# Altium PCB BLDC_Gimbal.PcbDoc (part 2 of 3)
Units mil, origin at the board's own origin, x right, y up, seen from the top; angles counter-clockwise.
Board outline 4133.86 x 2204.72 mil, 4 copper layers (Top Layer, GND, Power, Bottom Layer), stack 23.756 mil thick; 131 components, 105 nets, 517 pads, 595 vias.
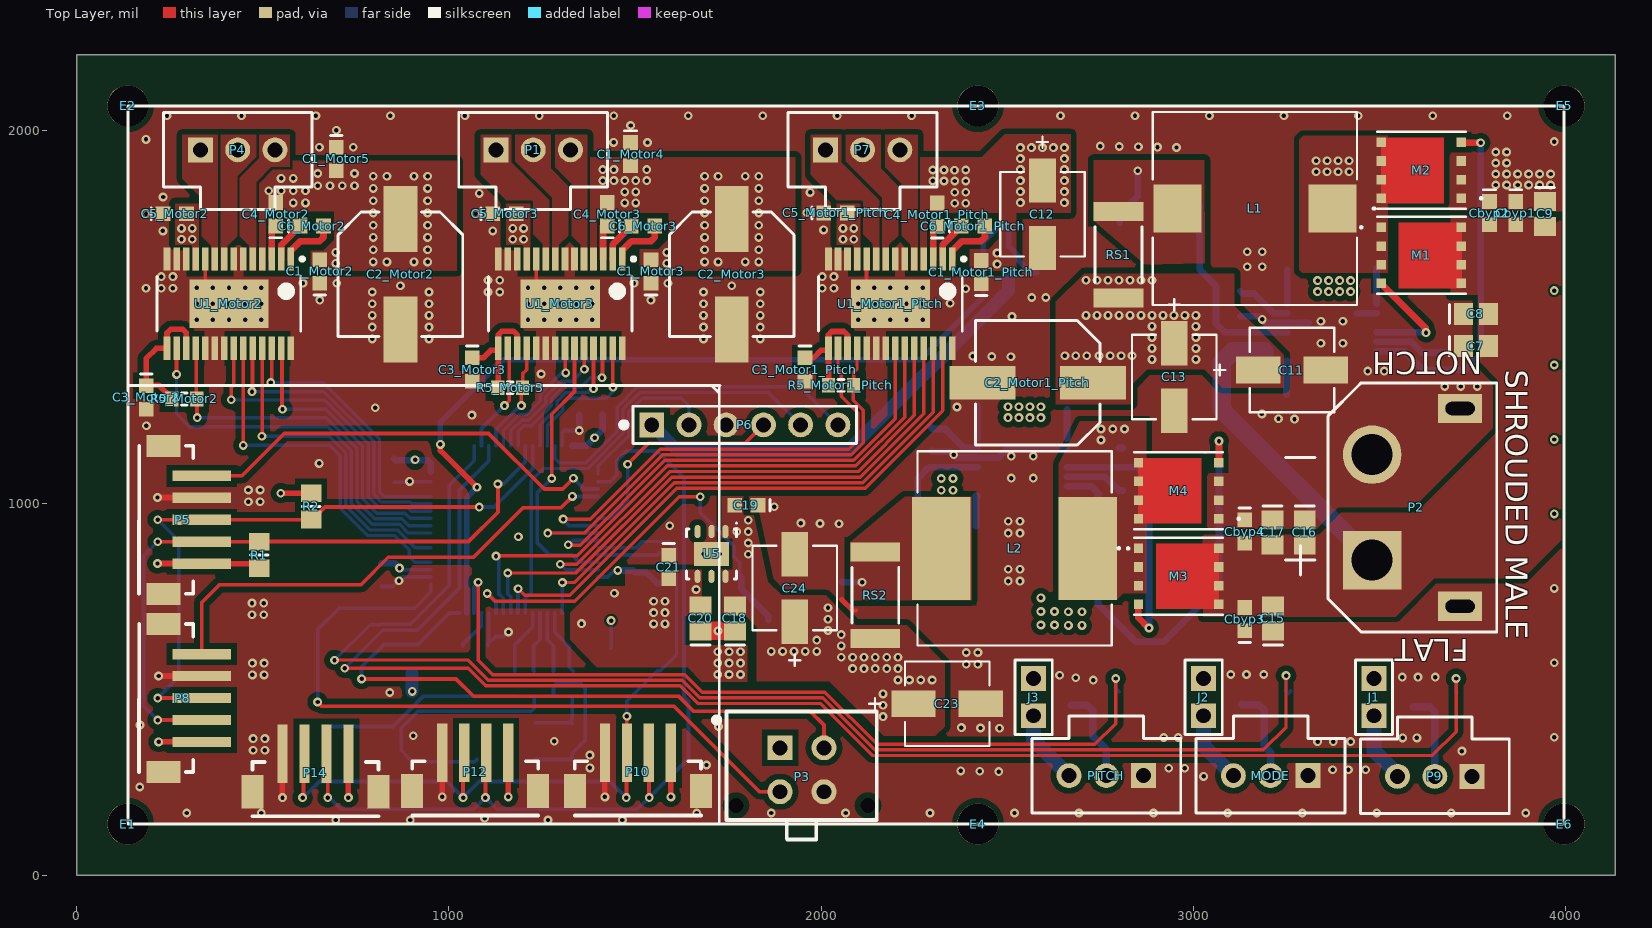
[diagram p0: Top Layer view]

## Part data (continued)
M2 M3 M4: "MOSFET N-CH 60V 50A 8-Pin VSON-FET EP T/R", Continuous Drain Current (ID)=62A, Drain to Source Breakdown Voltage=60V, Drain to Source Resistance=13mR, Gate to Source Voltage (Vgs)=20V, Input Capacitance=1.48nF, Manufacturer="Texas Instruments", Max Operating Temperature=150°C, Max Power Dissipation=3.2W, Min Operating Temperature=-55°C, Package Quantity=2500, Supplier Part Number 1=296-36455-1-ND, ComponentLink1Description=https://datasheet.ciiva.com/24021/slps391a-316771-24021744.pdf?src-supplier=Mouser, ComponentLink1URL=https://datasheet.ciiva.com/24021/slps391a-316771-24021744.pdf?src-supplier=Mouser, ComponentLink2Description=https://datasheet.ciiva.com/23803/1762822-23803793.pdf?src-supplier=Newark, ComponentLink2URL=https://datasheet.ciiva.com/23803/1762822-23803793.pdf?src-supplier=Newark, ComponentLink3Description=https://datasheet.ciiva.com/29755/csd18537nq5a-29755636.pdf?src-supplier=Digi-Key, ComponentLink3URL=https://datasheet.ciiva.com/29755/csd18537nq5a-29755636.pdf?src-supplier=Digi-Key, ComponentLink4Description=https://datasheet.ciiva.com/25645/csd18537nq5a-25645525.pdf?src-supplier=Digi-Key, ComponentLink4URL=https://datasheet.ciiva.com/25645/csd18537nq5a-25645525.pdf?src-supplier=Digi-Key, ComponentLink5Description=https://datasheet.ciiva.com/30021/csd18537nq5a-30021926.pdf?src-supplier=Avnet, ComponentLink5URL=https://datasheet.ciiva.com/30021/csd18537nq5a-30021926.pdf?src-supplier=Avnet, ComponentLink6Description=https://datasheet.ciiva.com/30021/csd18537nq5a-30021927.pdf?src-supplier=Avnet, ComponentLink6URL=https://datasheet.ciiva.com/30021/csd18537nq5a-30021927.pdf?src-supplier=Avnet, ComponentLink7Description=https://datasheet.ciiva.com/18566/csd18537nq5a-18566856.pdf?src-supplier=Digi-Key, ComponentLink7URL=https://datasheet.ciiva.com/18566/csd18537nq5a-18566856.pdf?src-supplier=Digi-Key, Contact Plating=Copper, Drain to Source Voltage (Vdss)=60V, Element Configuration=Single, Fall Time=3.2ns, Lead Free="Contains Lead", Manufacturer Part Number=CSD18537NQ5A, Mount="Surface Mount", Nominal Vgs=3V, Number of Elements=1, Number of Pins=8, Packaging="Tape and Reel", Power Dissipation=3.2W, Pricing 1="1 = 0.94000, 10 = 0.83000, 100 = 0.65610, 500 = 0.50882, 1000 = 0.40170 (USD)", Radiation Hardening=No, Rds On Max=13mR, REACH SVHC="No SVHC", Rise Time=4ns, RoHS=Yes, Stock 1=21532, Supplier 1=Digi-Key, Turn-Off Delay Time=14.4ns, Turn-On Delay Time=5.8ns
MODE P1 P4 P7 P9 PITCH: library part "1x3-Pin, Pitch: 0.1\" (2.54mm), Tin, THT, Shrouded, Locking, 70543-0037", "1x3-Pin, Pitch: 0.1\" (2.54mm), Tin, THT, Shrouded, Locking, 70543-0037", Supplier Part Number 1=WM4825-ND, LatestRevisionDate=2014-03-18, LatestRevisionNote="Changed # of pins from 4 to 3", Mfg="Molex Inc", Mfg#=70543-0037, Published=2014-03-16, Publisher="UVic AERO, Kirk Richardson", ReviewedBy="Matthew Fitz", ReviewedDate=2014-03-19, ReviewedNote="There should be tin pins instead of gold", Supplier 1=Digi-Key, Verified=Yes
P2: "XT60 - 2x1-Pin, Pitch: 3.00mm, Battery Connector", Published=2016-12-15, Publisher="UVic AERO, Luke Mills"
P3: library part "2x2-Pin, Pitch: 3.00mm, Tin, THT, 43045-0412", "2x2-Pin, Pitch: 3.00mm, Tin, THT, Shrouded, Locking, 43045-0412", Supplier Part Number 1=WM1790-ND, LatestRevisionBy="Kirk Richardson", LatestRevisionDate=2014-03-23, LatestRevisionNote="Fixed footprint so it's aligned to pin 1", Mfg=Molex, Mfg#=43045-0412, Published=2014-03-13, Publisher="UVic AERO, Taylor Eby", ReviewedBy="Kirk Richardson", ReviewedDate=2014-03-23, Supplier 1=Digi-Key, Verified=Yes
P5 P8: "CONN HEADER ZH TOP 5POS 1.5MM", Color=Natural, Current Rating=1A, Manufacturer=JST, Supplier Part Number 1=455-1684-1-ND, ComponentLink1Description=http://www.jst-mfg.com/product/pdf/eng/eZH.pdf?src-supplier=Digi-Key, ComponentLink1URL=http://www.jst-mfg.com/product/pdf/eng/eZH.pdf?src-supplier=Digi-Key, ComponentLink2Description=http://www.jst-mfg.com/product/pdf/eng/eZR.pdf?src-supplier=Future+Electronics, ComponentLink2URL=http://www.jst-mfg.com/product/pdf/eng/eZR.pdf?src-supplier=Future+Electronics, Connector Type="Male Pin", Contact Material=Tin, Contact Plating=Tin, Fastening Type=Detent, Gender=Male, Height=7.2mm, Housing Color=Natural, Housing Material=Nylon, Lead Free="Lead Free", Length=10.5mm, Manufacturer Part Number=B5B-ZR-SM4-TF(LF)(SN), Mount="Surface Mount", Number of Contacts=5, Number of Positions=5, Number of Rows=1, Packaging="Tape and Reel", Pitch=0.059inch, Pricing 1="1 = 0.790000, 10 = 0.742000, 100 = 0.568600, 500 = 0.494420 (USD)", RoHS=Yes, Stock 1=52019, Supplier 1=Digi-Key, Termination=Solder, Width=3.5mm
P6: library part "Header, 1x6-Pin, Pitch: 0.1\" (2.54mm), Gold 30µin, THT, 68000-106HLF", "Header, 1x6-Pin, Pitch: 0.1\" (2.54mm), Gold 30µin, THT, 68000-106HLF", Supplier Part Number 1=609-3249-ND, Mfg=FCI, Mfg#=68000-106HLF, Published=2014-03-16, Publisher="UVic AERO, Kirk Richardson", Supplier 1=Digi-Key, Verified=No
P10 P12 P14: "Conn Shrouded Header HDR 4 POS 1.5mm Solder ST SMD T/R", Color=Natural, Contact Resistance=30mR, Current Rating=1A, Housing Color=Beige, Manufacturer=JST, Max Operating Temperature=85°C, Max Voltage Rating (AC)=50V, Min Operating Temperature=-25°C, Supplier Part Number 1=455-1683-1-ND, ComponentLink1Description=https://datasheet.ciiva.com/26924/getdatasheetpartid-640935-26924037.pdf?src-supplier=Verical, ComponentLink1URL=https://datasheet.ciiva.com/26924/getdatasheetpartid-640935-26924037.pdf?src-supplier=Verical, Connector Type="Male Pin", Contact Material=Tin, Contact Plating=Tin, Depth=3.7mm, Fastening Type=Detent, Gender=Male, Height=7.2mm, Housing Material=Polyamide, Lead Free="Lead Free", Length=9mm, Manufacturer Part Number=B4B-ZR-SM4-TF(LF)(SN), Max Current Rating=1A, Mount="Surface Mount", Number of Contacts=4, Number of Positions=4, Number of Rows=1, Orientation=Straight, Packaging="Tape and Reel", Pitch=1.5mm, Pricing 1="1 = 0.71000, 10 = 0.67000, 100 = 0.51380, 500 = 0.44682 (USD)", RoHS=Yes, Stock 1=27718, Supplier 1=Digi-Key, Termination=Solder, Width=3.5mm
R1 R2 R3 R4: library part RC0805FR-074K7L, "RES SMD 4.7k ohm, 150 V, 0805 [2012 Metric], 250 mW,  1%", Case/Package=0805, Case Code (Metric)=2012, Manufacturer=Yageo, Max Operating Temperature=155°C, Max Power Dissipation=125mW, Min Operating Temperature=-55°C, Package Quantity=5000, Resistance=4.7kR, Supplier Part Number 1=311-4.70KCRCT-ND, Temperature Coefficient=100ppm/°C, Tolerance=1%, Voltage Rating=150V, Case Code (Imperial)=0805, ComponentLink1Description=https://datasheet.ciiva.com/11808/0900766b8106beab-11808155.pdf?src-supplier=RSComponents, ComponentLink1URL=https://datasheet.ciiva.com/11808/0900766b8106beab-11808155.pdf?src-supplier=RSComponents, ComponentLink2Description=https://datasheet.ciiva.com/7941/1686128-7941805.pdf?src-supplier=Element14, ComponentLink2URL=https://datasheet.ciiva.com/7941/1686128-7941805.pdf?src-supplier=Element14, ComponentLink3Description=https://datasheet.ciiva.com/7941/444164-7941806.pdf?src-supplier=Element14, ComponentLink3URL=https://datasheet.ciiva.com/7941/444164-7941806.pdf?src-supplier=Element14, ComponentLink4Description=https://datasheet.ciiva.com/6547/pyu-r-int-thick-7-6547263.pdf?src-supplier=Digi-Key, ComponentLink4URL=https://datasheet.ciiva.com/6547/pyu-r-int-thick-7-6547263.pdf?src-supplier=Digi-Key, ComponentLink5Description=https://datasheet.ciiva.com/7941/444164-7941804.pdf?src-supplier=Element14, ComponentLink5URL=https://datasheet.ciiva.com/7941/444164-7941804.pdf?src-supplier=Element14, ComponentLink6Description=https://datasheet.ciiva.com/46447/444164-46447583.pdf?src-supplier=Element14, ComponentLink6URL=https://datasheet.ciiva.com/46447/444164-46447583.pdf?src-supplier=Element14, Composition="Thick Film", Depth=1.25mm, Features="Moisture Resistant", Height=0.024inch, Lead Free="Lead Free", Length=0.079inch, Manufacturer Part Number=RC0805FR-074K7L, Military Standard=Not, Number of Pins=2, Number of Terminations=2, Packaging="Tape and Reel", Power Rating=125mW, Pricing 1="1 = 0.10000, 10 = 0.04200, 100 = 0.01700, 1000 = 0.00762, 2500 = 0.00662 (USD)", REACH SVHC="No SVHC", RoHS=Yes, Stock 1=5392599, Supplier 1=Digi-Key, Termination=SMD/SMT, Voltage Rating (DC)=150V, Width=0.049inch
R5_Motor1_Pitch R5_Motor2 R5_Motor3: library part "10.0K, 1%, 1/10 W, 0603 SMD", "Resistor, 1%, 1/10 W, 0603 SMD, 10.0K, +/-100ppm/C, Thick Film", Power=1/10W, Supplier Part Number 1=311-10.0KHRCT-ND, PackageDescription="Chip Resistor", Published="Jan 14, 2011", Publisher="TRAXX Automation Ltd.", Supplier 1=Digi-Key
R6: "RES SMD 2.74K OHM 1% 1/8W 0805", Case/Package=0805, Case Code (Metric)=2012, Manufacturer=Panasonic, Max Operating Temperature=155°C, Max Power Dissipation=125mW, Min Operating Temperature=-55°C, Package Quantity=5000, Resistance=2.74k, Supplier Part Number 1=P2.74KCCT-ND, Temperature Coefficient=100ppm/°C, Tolerance=1%, Voltage Rating=150V, Case Code (Imperial)=0805, ComponentLink1Description=https://datasheet.ciiva.com/34303/1989210-34303628.pdf?src-supplier=Jameco, ComponentLink1URL=https://datasheet.ciiva.com/34303/1989210-34303628.pdf?src-supplier=Jameco, ComponentLink2Description=https://datasheet.ciiva.com/16773/70260748-16773765.pdf?src-supplier=Allied+Electronics, ComponentLink2URL=https://datasheet.ciiva.com/16773/70260748-16773765.pdf?src-supplier=Allied+Electronics, ComponentLink3Description=https://datasheet.ciiva.com/46389/426256-46389477.pdf?src-supplier=Element14, ComponentLink3URL=https://datasheet.ciiva.com/46389/426256-46389477.pdf?src-supplier=Element14, ComponentLink4Description=https://datasheet.ciiva.com/6129/426256-6129654.pdf?src-supplier=Farnell, ComponentLink4URL=https://datasheet.ciiva.com/6129/426256-6129654.pdf?src-supplier=Farnell, ComponentLink5Description=https://datasheet.ciiva.com/30134/aoa0000ce2-30134518.pdf?src-supplier=Onlinecomponents.com, ComponentLink5URL=https://datasheet.ciiva.com/30134/aoa0000ce2-30134518.pdf?src-supplier=Onlinecomponents.com, ComponentLink6Description=https://datasheet.ciiva.com/24162/aoa0000ce2-24162695.pdf?src-supplier=Mouser, ComponentLink6URL=https://datasheet.ciiva.com/24162/aoa0000ce2-24162695.pdf?src-supplier=Mouser, ComponentLink7Description=https://datasheet.ciiva.com/9196/aoa0000ce2-9196826.pdf?src-supplier=Avnet, ComponentLink7URL=https://datasheet.ciiva.com/9196/aoa0000ce2-9196826.pdf?src-supplier=Avnet, ComponentLink8Description=https://datasheet.ciiva.com/15159/getdatasheetpartid-32746-15159322.pdf?src-supplier=Verical, ComponentLink8URL=https://datasheet.ciiva.com/15159/getdatasheetpartid-32746-15159322.pdf?src-supplier=Verical, ComponentLink9Description=https://datasheet.ciiva.com/46377/426256-46377834.pdf?src-supplier=Element14, ComponentLink9URL=https://datasheet.ciiva.com/46377/426256-46377834.pdf?src-supplier=Element14, ComponentLink10Description=https://datasheet.ciiva.com/28531/1678782-28531694.pdf?src-supplier=Element14, ComponentLink10URL=https://datasheet.ciiva.com/28531/1678782-28531694.pdf?src-supplier=Element14, Composition="Thick Film", Contact Plating=Tin, Depth=1.25mm, Height=0.6mm, Lead Free="Lead Free", Length=2mm, Manufacturer Part Number=ERJ-6ENF2741V, Military Standard=Not, Mount="Surface Mount", Number of Terminations=2, Packaging="Tape and Reel", Power Rating=125mW, Pricing 1="1 = 0.10000, 10 = 0.08100, 100 = 0.03110, 1000 = 0.01367, 2500 = 0.01181 (USD)", Radiation Hardening=No, REACH SVHC="No SVHC", RoHS=Yes, Stock 1=212786, Supplier 1=Digi-Key, Termination=SMD/SMT, Voltage Rating (DC)=150V, Weight=0.000194oz, Width=0.049inch
R7: "RES SMD 191K OHM 1% 1/8W 0805", Case/Package=0805, Case Code (Metric)=2012, Manufacturer=Panasonic, Max Operating Temperature=155°C, Max Power Dissipation=125mW, Min Operating Temperature=-55°C, Package Quantity=1, Resistance=191k, Supplier Part Number 1=P191KCCT-ND, Temperature Coefficient=100ppm/°C, Tolerance=1%, Voltage Rating=150V, Case Code (Imperial)=0805, ComponentLink1Description=https://datasheet.ciiva.com/22729/1678782-22729194.pdf?src-supplier=Farnell, ComponentLink1URL=https://datasheet.ciiva.com/22729/1678782-22729194.pdf?src-supplier=Farnell, Composition="Thick Film", Contact Plating=Tin, Depth=1.25mm, Features="Automotive AEC-Q200", Height=0.028inch, Lead Free="Lead Free", Length=2mm, Manufacturer Part Number=ERJ-6ENF1913V, Military Standard=Not, Mount="Surface Mount", Number of Terminations=2, Packaging="Tape and Reel", Power Rating=125mW, Pricing 1="1 = 0.10000, 10 = 0.08100, 100 = 0.03110, 1000 = 0.01367, 2500 = 0.01181 (USD)", REACH SVHC="No SVHC", RoHS=Yes, Stock 1=22046, Supplier 1=Digi-Key, Voltage Rating (DC)=150V, Width=1.2mm
R8 R12 R15: "RES SMD 10K OHM 1% 1/8W 0805", Case/Package=0805, Case Code (Metric)=2012, Manufacturer=Vishay, Max Operating Temperature=155°C, Min Operating Temperature=-55°C, Package Quantity=5000, Power Rating=125mW, Resistance=10k, Supplier Part Number 1=541-10.0KCCT-ND, Temperature Coefficient=100ppm/°C, Tolerance=1%, Voltage Rating=150V, Case Code (Imperial)=0805, ComponentLink1Description=https://datasheet.ciiva.com/11808/0900766b80d98b26-11808216.pdf?src-supplier=RSComponents, ComponentLink1URL=https://datasheet.ciiva.com/11808/0900766b80d98b26-11808216.pdf?src-supplier=RSComponents, ComponentLink2Description=https://datasheet.ciiva.com/16514/dcrcwe3-16514907.pdf?src-supplier=Avnet+Asia, ComponentLink2URL=https://datasheet.ciiva.com/16514/dcrcwe3-16514907.pdf?src-supplier=Avnet+Asia, ComponentLink3Description=https://datasheet.ciiva.com/16883/dcrcwe3-16883708.pdf?src-supplier=Avnet+Europe, ComponentLink3URL=https://datasheet.ciiva.com/16883/dcrcwe3-16883708.pdf?src-supplier=Avnet+Europe, ComponentLink4Description=https://datasheet.ciiva.com/8337/dcrcwe3-8337773.pdf?src-supplier=Avnet, ComponentLink4URL=https://datasheet.ciiva.com/8337/dcrcwe3-8337773.pdf?src-supplier=Avnet, ComponentLink5Description=https://datasheet.ciiva.com/16755/70201119-16755389.pdf?src-supplier=Allied+Electronics, ComponentLink5URL=https://datasheet.ciiva.com/16755/70201119-16755389.pdf?src-supplier=Allied+Electronics, ComponentLink6Description=https://datasheet.ciiva.com/46394/1720486-46394381.pdf?src-supplier=Element14, ComponentLink6URL=https://datasheet.ciiva.com/46394/1720486-46394381.pdf?src-supplier=Element14, ComponentLink7Description=https://datasheet.ciiva.com/8337/dcrcwe3-8337774.pdf?src-supplier=Avnet, ComponentLink7URL=https://datasheet.ciiva.com/8337/dcrcwe3-8337774.pdf?src-supplier=Avnet, ComponentLink8Description=https://datasheet.ciiva.com/16199/dcrcwe3-16199086.pdf?src-supplier=Future+Electronics, ComponentLink8URL=https://datasheet.ciiva.com/16199/dcrcwe3-16199086.pdf?src-supplier=Future+Electronics, ComponentLink9Description=https://datasheet.ciiva.com/5547/dcrcwe3-109170-5547559.pdf?src-supplier=Mouser, ComponentLink9URL=https://datasheet.ciiva.com/5547/dcrcwe3-109170-5547559.pdf?src-supplier=Mouser, ComponentLink10Description=https://datasheet.ciiva.com/16719/70201119-16719082.pdf?src-supplier=Allied+Electronics, ComponentLink10URL=https://datasheet.ciiva.com/16719/70201119-16719082.pdf?src-supplier=Allied+Electronics, Composition="Thick Film", Contact Plating=Tin, Depth=1.25mm, Height=0.45mm, Lead Free="Lead Free", Length=2mm, Manufacturer Part Number=CRCW080510K0FKEA, Military Standard=Not, Packaging="Tape and Reel", Pricing 1="1 = 0.10000, 10 = 0.06600, 100 = 0.02670, 1000 = 0.01199, 2500 = 0.01041 (USD)", Radiation Hardening=No, REACH SVHC=Unknown, RoHS=Yes, Stock 1=374664, Supplier 1=Digi-Key, Termination=SMD/SMT, Voltage Rating (DC)=150V, Weight=0.000194oz, Width=1.25mm
R9: "RES SMD 69.8K OHM 1% 1/8W 0805", Case/Package=0805, Case Code (Metric)=2012, Manufacturer=Panasonic, Max Operating Temperature=155°C, Max Power Dissipation=125mW, Min Operating Temperature=-55°C, Package Quantity=1, Resistance=69.8k, Supplier Part Number 1=P69.8KCCT-ND, Temperature Coefficient=100ppm/°C, Tolerance=1%, Voltage Rating=150V, Case Code (Imperial)=0805, ComponentLink1Description=https://datasheet.ciiva.com/22682/1678782-22682501.pdf?src-supplier=Element14, ComponentLink1URL=https://datasheet.ciiva.com/22682/1678782-22682501.pdf?src-supplier=Element14, ComponentLink2Description=https://datasheet.ciiva.com/24027/aoa0000ce2-24027573.pdf?src-supplier=Mouser, ComponentLink2URL=https://datasheet.ciiva.com/24027/aoa0000ce2-24027573.pdf?src-supplier=Mouser, ComponentLink3Description=https://datasheet.ciiva.com/7937/aoa0000ce2-7937462.pdf?src-supplier=Element14, ComponentLink3URL=https://datasheet.ciiva.com/7937/aoa0000ce2-7937462.pdf?src-supplier=Element14, ComponentLink4Description=https://datasheet.ciiva.com/22730/1678782-22730040.pdf?src-supplier=Farnell, ComponentLink4URL=https://datasheet.ciiva.com/22730/1678782-22730040.pdf?src-supplier=Farnell, ComponentLink5Description=https://datasheet.ciiva.com/28592/1694929-28592344.pdf?src-supplier=Element14, ComponentLink5URL=https://datasheet.ciiva.com/28592/1694929-28592344.pdf?src-supplier=Element14, ComponentLink6Description=https://datasheet.ciiva.com/9187/aoa0000ce2-9187962.pdf?src-supplier=Avnet, ComponentLink6URL=https://datasheet.ciiva.com/9187/aoa0000ce2-9187962.pdf?src-supplier=Avnet, ComponentLink7Description=https://datasheet.ciiva.com/16789/70260748-16789163.pdf?src-supplier=Allied+Electronics, ComponentLink7URL=https://datasheet.ciiva.com/16789/70260748-16789163.pdf?src-supplier=Allied+Electronics, Composition="Thick Film", Contact Plating=Tin, Depth=1.25mm, Features="Automotive AEC-Q200", Height=0.6mm, Height - Seated (Max)=0.028inch, Lead Free="Lead Free", Length=2mm, Manufacturer Part Number=ERJ-6ENF6982V, Military Standard=Not, Mount="Surface Mount", Number of Terminations=2, Packaging="Tape and Reel", Power Rating=125mW, Pricing 1="1 = 0.10000, 10 = 0.08100, 100 = 0.03110, 1000 = 0.01367, 2500 = 0.01181 (USD)", Radiation Hardening=No, REACH SVHC=Unknown, RoHS=Yes, Stock 1=129613, Supplier 1=Digi-Key, Termination=SMD/SMT, Voltage Rating (DC)=150V, Width=0.049inch
R10: "RES SMD 1.74K OHM 1% 1/8W 0805", Case/Package=0805, Case Code (Metric)=2012, Manufacturer=Panasonic, Max Operating Temperature=155°C, Max Power Dissipation=125mW, Min Operating Temperature=-55°C, Package Quantity=1, Resistance=1.74k, Supplier Part Number 1=P1.74KCCT-ND, Temperature Coefficient=100ppm/°C, Tolerance=1%, Voltage Rating=150V, Case Code (Imperial)=0805, ComponentLink1Description=https://datasheet.ciiva.com/3883/3984280s8821682n1386-3883650.pdf?src-supplier=Arrow, ComponentLink1URL=https://datasheet.ciiva.com/3883/3984280s8821682n1386-3883650.pdf?src-supplier=Arrow, ComponentLink2Description=https://datasheet.ciiva.com/22743/1678782-22743561.pdf?src-supplier=Farnell, ComponentLink2URL=https://datasheet.ciiva.com/22743/1678782-22743561.pdf?src-supplier=Farnell, ComponentLink3Description=https://datasheet.ciiva.com/46437/1678782-46437836.pdf?src-supplier=Element14, ComponentLink3URL=https://datasheet.ciiva.com/46437/1678782-46437836.pdf?src-supplier=Element14, ComponentLink4Description=https://datasheet.ciiva.com/22682/1678782-22682493.pdf?src-supplier=Element14, ComponentLink4URL=https://datasheet.ciiva.com/22682/1678782-22682493.pdf?src-supplier=Element14, ComponentLink5Description=https://datasheet.ciiva.com/9197/aoa0000ce2-9197802.pdf?src-supplier=Avnet, ComponentLink5URL=https://datasheet.ciiva.com/9197/aoa0000ce2-9197802.pdf?src-supplier=Avnet, ComponentLink6Description=https://datasheet.ciiva.com/24071/aoa0000ce2-24071082.pdf?src-supplier=Mouser, ComponentLink6URL=https://datasheet.ciiva.com/24071/aoa0000ce2-24071082.pdf?src-supplier=Mouser, ComponentLink7Description=https://datasheet.ciiva.com/16762/70260748-16762251.pdf?src-supplier=Allied+Electronics, ComponentLink7URL=https://datasheet.ciiva.com/16762/70260748-16762251.pdf?src-supplier=Allied+Electronics, Composition="Thick Film", Contact Plating=Tin, Depth=1.25mm, Features="Automotive AEC-Q200", Height=0.6mm, Lead Free="Lead Free", Length=2mm, Manufacturer Part Number=ERJ6ENF1741V, Military Standard=Not, Mount="Surface Mount", Number of Terminations=2, Packaging="Tape and Reel", Power Rating=125mW, Pricing 1="1 = 0.10000, 10 = 0.08100, 100 = 0.03110, 1000 = 0.01367, 2500 = 0.01181 (USD)", REACH SVHC=Unknown, RoHS=Yes, Stock 1=142494, Supplier 1=Digi-Key, Termination=SMD/SMT, Voltage Rating (DC)=150V, Width=0.049inch
R11: "RES SMD 73.2K OHM 1% 1/8W 0805", Case/Package=0805, Case Code (Metric)=2012, Manufacturer=Panasonic, Max Operating Temperature=155°C, Max Power Dissipation=125mW, Min Operating Temperature=-55°C, Package Quantity=1, Resistance=73.2k, Supplier Part Number 1=P73.2KCCT-ND, Temperature Coefficient=100ppm/°C, Tolerance=1%, Voltage Rating=150V, Case Code (Imperial)=0805, ComponentLink1Description=https://datasheet.ciiva.com/22682/1678782-22682502.pdf?src-supplier=Element14, ComponentLink1URL=https://datasheet.ciiva.com/22682/1678782-22682502.pdf?src-supplier=Element14, ComponentLink2Description=https://datasheet.ciiva.com/7862/aoa0000ce2-7862010.pdf?src-supplier=Element14, ComponentLink2URL=https://datasheet.ciiva.com/7862/aoa0000ce2-7862010.pdf?src-supplier=Element14, ComponentLink3Description=https://datasheet.ciiva.com/15830/aoa0000ce2-15830506.pdf?src-supplier=Onlinecomponents.com, ComponentLink3URL=https://datasheet.ciiva.com/15830/aoa0000ce2-15830506.pdf?src-supplier=Onlinecomponents.com, ComponentLink4Description=https://datasheet.ciiva.com/46373/1678782-46373845.pdf?src-supplier=Element14, ComponentLink4URL=https://datasheet.ciiva.com/46373/1678782-46373845.pdf?src-supplier=Element14, ComponentLink5Description=https://datasheet.ciiva.com/9187/aoa0000ce2-9187800.pdf?src-supplier=Avnet, ComponentLink5URL=https://datasheet.ciiva.com/9187/aoa0000ce2-9187800.pdf?src-supplier=Avnet, ComponentLink6Description=https://datasheet.ciiva.com/24061/aoa0000ce2-24061742.pdf?src-supplier=Mouser, ComponentLink6URL=https://datasheet.ciiva.com/24061/aoa0000ce2-24061742.pdf?src-supplier=Mouser, Composition="Thick Film", Contact Plating=Tin, Depth=1.25mm, Features="Automotive AEC-Q200", Height=0.028inch, Lead Free="Contains Lead", Length=2mm, Manufacturer Part Number=ERJ-6ENF7322V, Military Standard=Not, Mount="Surface Mount", Number of Terminations=2, Packaging="Tape and Reel", Power Rating=125mW, Pricing 1="1 = 0.10000, 10 = 0.08100, 100 = 0.03110, 1000 = 0.01367, 2500 = 0.01181 (USD)", REACH SVHC=Yes, RoHS=Yes, Stock 1=155375, Supplier 1=Digi-Key, Termination=SMD/SMT, Voltage Rating (DC)=150V, Width=0.049inch
R13 R14 R16 R17: library part "0R, 1/10 W, 0603 SMD", "Resistor, 0R, 1/10 W, 0603 SMD, 0R, +/-200ppm/C, Thick Film", Power=1/10W, Supplier Part Number 1=311-0.0GRCT-ND, PackageDescription="Chip Resistor", Published="Jan 14, 2011", Publisher="TRAXX Automation Ltd.", Supplier 1=Digi-Key
RL1: "RES SMD 40.2K OHM 0.1% 1/10W 0603", Case/Package=0603, Case Code (Metric)=1608, Manufacturer=Panasonic, Max Operating Temperature=155°C, Max Power Dissipation=100mW, Min Operating Temperature=-55°C, Package Quantity=1, Resistance=40.2k, Supplier Part Number 1=P40.2KDBCT-ND, Temperature Coefficient=25ppm/°C, Tolerance=0.1%, Voltage Rating=75V, Case Code (Imperial)=0603, ComponentLink1Description=https://datasheet.ciiva.com/11809/0900766b80eb1d8c-11809819.pdf?src-supplier=RSComponents, ComponentLink1URL=https://datasheet.ciiva.com/11809/0900766b80eb1d8c-11809819.pdf?src-supplier=RSComponents, ComponentLink2Description=https://datasheet.ciiva.com/9189/aoa0000ce26-9189881.pdf?src-supplier=Avnet, ComponentLink2URL=https://datasheet.ciiva.com/9189/aoa0000ce26-9189881.pdf?src-supplier=Avnet, ComponentLink3Description=https://datasheet.ciiva.com/7870/485442-7870587.pdf?src-supplier=Element14, ComponentLink3URL=https://datasheet.ciiva.com/7870/485442-7870587.pdf?src-supplier=Element14, ComponentLink4Description=https://datasheet.ciiva.com/6129/485442-6129390.pdf?src-supplier=Farnell, ComponentLink4URL=https://datasheet.ciiva.com/6129/485442-6129390.pdf?src-supplier=Farnell, Composition="Thin Film", Contact Plating=Tin, Depth=0.8mm, Features="Automotive AEC-Q200", Height=0.45mm, Lead Free="Lead Free", Length=1.6mm, Manufacturer Part Number=ERA3AEB4022V, Military Standard=Not, Mount="Surface Mount", Number of Pins=2, Number of Terminations=2, Packaging="Tape and Reel", Power Rating=100mW, Pricing 1="1 = 0.35000, 10 = 0.30000, 100 = 0.11720, 1000 = 0.04906, 2500 = 0.04498 (USD)", Radiation Hardening=No, REACH SVHC="No SVHC", RoHS=Yes, Stock 1=72800, Supplier 1=Digi-Key, Voltage Rating (DC)=75V, Width=0.8mm
RL2: "RES SMD 43.2K OHM 0.1% 1/10W 0603", Case/Package=0603, Case Code (Metric)=1608, Manufacturer=Panasonic, Max Operating Temperature=155°C, Max Power Dissipation=100mW, Min Operating Temperature=-55°C, Package Quantity=1, Resistance=43.2k, Supplier Part Number 1=P43.2KDBCT-ND, Temperature Coefficient=25ppm/°C, Tolerance=0.1%, Voltage Rating=75V, Case Code (Imperial)=0603, ComponentLink1Description=https://datasheet.ciiva.com/11814/0900766b80eb1d8c-11814843.pdf?src-supplier=RSComponents, ComponentLink1URL=https://datasheet.ciiva.com/11814/0900766b80eb1d8c-11814843.pdf?src-supplier=RSComponents, ComponentLink2Description=https://datasheet.ciiva.com/7861/485442-7861685.pdf?src-supplier=Element14, ComponentLink2URL=https://datasheet.ciiva.com/7861/485442-7861685.pdf?src-supplier=Element14, ComponentLink3Description=https://datasheet.ciiva.com/5968/485442-5968894.pdf?src-supplier=Farnell, ComponentLink3URL=https://datasheet.ciiva.com/5968/485442-5968894.pdf?src-supplier=Farnell, ComponentLink4Description=https://datasheet.ciiva.com/9189/aoa0000ce26-9189639.pdf?src-supplier=Avnet, ComponentLink4URL=https://datasheet.ciiva.com/9189/aoa0000ce26-9189639.pdf?src-supplier=Avnet, ComponentLink5Description=https://datasheet.ciiva.com/5968/485442-5968890.pdf?src-supplier=Farnell, ComponentLink5URL=https://datasheet.ciiva.com/5968/485442-5968890.pdf?src-supplier=Farnell, Composition="Thin Film", Contact Plating=Tin, Depth=0.8mm, Features="Automotive AEC-Q200", Height=0.45mm, Lead Free="Lead Free", Length=1.6mm, Manufacturer Part Number=ERA3AEB4322V, Military Standard=Not, Mount="Surface Mount", Number of Pins=2, Number of Terminations=2, Packaging="Tape and Reel", Power Rating=100mW, Pricing 1="1 = 0.35000, 10 = 0.30000, 100 = 0.11720, 1000 = 0.04906, 2500 = 0.04498 (USD)", Radiation Hardening=No, REACH SVHC="No SVHC", RoHS=Yes, Stock 1=70685, Supplier 1=Digi-Key, Termination=SMD/SMT, Voltage Rating (DC)=75V, Width=0.8mm
Ron1: "RES SMD 249K OHM 1% 1/8W 0805", Case/Package=0805, Case Code (Metric)=2012, Manufacturer=Vishay, Max Operating Temperature=155°C, Max Power Dissipation=125mW, Min Operating Temperature=-55°C, Package Quantity=10, Resistance=249k, Supplier Part Number 1=541-249KCCT-ND, Temperature Coefficient=100ppm/°C, Tolerance=1%, Voltage Rating=150V, Case Code (Imperial)=0805, ComponentLink1Description=https://datasheet.ciiva.com/11810/0900766b80d98b26-11810118.pdf?src-supplier=RSComponents, ComponentLink1URL=https://datasheet.ciiva.com/11810/0900766b80d98b26-11810118.pdf?src-supplier=RSComponents, ComponentLink2Description=https://datasheet.ciiva.com/8953/dcrcwe3-8953862.pdf?src-supplier=Avnet, ComponentLink2URL=https://datasheet.ciiva.com/8953/dcrcwe3-8953862.pdf?src-supplier=Avnet, ComponentLink3Description=https://datasheet.ciiva.com/2495/dcrcwe3-2495575.pdf?src-supplier=Digi-Key, ComponentLink3URL=https://datasheet.ciiva.com/2495/dcrcwe3-2495575.pdf?src-supplier=Digi-Key, ComponentLink4Description=https://datasheet.ciiva.com/2495/dcrcwe3-2495576.pdf?src-supplier=Digi-Key, ComponentLink4URL=https://datasheet.ciiva.com/2495/dcrcwe3-2495576.pdf?src-supplier=Digi-Key, ComponentLink5Description=https://datasheet.ciiva.com/3258/dcrcwe3-3258360.pdf?src-supplier=Avnet, ComponentLink5URL=https://datasheet.ciiva.com/3258/dcrcwe3-3258360.pdf?src-supplier=Avnet, ComponentLink6Description=https://datasheet.ciiva.com/2495/dcrcwe3-2495577.pdf?src-supplier=Digi-Key, ComponentLink6URL=https://datasheet.ciiva.com/2495/dcrcwe3-2495577.pdf?src-supplier=Digi-Key, ComponentLink7Description=https://datasheet.ciiva.com/16853/dcrcwe3-16853034.pdf?src-supplier=Avnet+Europe, ComponentLink7URL=https://datasheet.ciiva.com/16853/dcrcwe3-16853034.pdf?src-supplier=Avnet+Europe, ComponentLink8Description=https://datasheet.ciiva.com/22709/1533075-22709070.pdf?src-supplier=Element14, ComponentLink8URL=https://datasheet.ciiva.com/22709/1533075-22709070.pdf?src-supplier=Element14, ComponentLink9Description=https://datasheet.ciiva.com/5550/dcrcwe3-109170-5550479.pdf?src-supplier=Mouser, ComponentLink9URL=https://datasheet.ciiva.com/5550/dcrcwe3-109170-5550479.pdf?src-supplier=Mouser, ComponentLink10Description=https://datasheet.ciiva.com/7674/1533075-7674111.pdf?src-supplier=Element14, ComponentLink10URL=https://datasheet.ciiva.com/7674/1533075-7674111.pdf?src-supplier=Element14, Composition="Thick Film", Contact Plating=Tin, Depth=1.25mm, Features="Automotive AEC-Q200", Height=0.45mm, Lead Free="Lead Free", Length=2mm, Manufacturer Part Number=CRCW0805249KFKEA, Military Standard=Not, Number of Terminations=2, Packaging="Tape and Reel", Power Rating=125mW, Pricing 1="1 = 0.10000, 10 = 0.06600, 100 = 0.02670, 1000 = 0.01199, 2500 = 0.01041 (USD)", Radiation Hardening=No, REACH SVHC=Unknown, RoHS=Yes, Stock 1=10745, Supplier 1=Digi-Key, Termination=SMD/SMT, Voltage Rating (DC)=150V, Weight=0.000194oz, Width=0.049inch
RS1: "RES SMD 10 MOHM, 2512 [6432 Metric], 3 W,  1%, CR Series", Case/Package=2512, Case Code (Metric)=6432, Manufacturer=Bourns, Max Operating Temperature=170°C, Max Power Dissipation=3W, Min Operating Temperature=-55°C, Package Quantity=1, Resistance=10m, Supplier Part Number 1=70154444, Temperature Coefficient=75ppm/°C, Tolerance=1%, Case Code (Imperial)=2512, ComponentLink1Description=https://datasheet.ciiva.com/15225/getdatasheetpartid-73855-15225377.pdf?src-supplier=Verical, ComponentLink1URL=https://datasheet.ciiva.com/15225/getdatasheetpartid-73855-15225377.pdf?src-supplier=Verical, ComponentLink2Description=https://datasheet.ciiva.com/22692/1828418-22692561.pdf?src-supplier=Element14, ComponentLink2URL=https://datasheet.ciiva.com/22692/1828418-22692561.pdf?src-supplier=Element14, ComponentLink3Description=https://datasheet.ciiva.com/11810/0900766b80ddce06-11810742.pdf?src-supplier=RSComponents, ComponentLink3URL=https://datasheet.ciiva.com/11810/0900766b80ddce06-11810742.pdf?src-supplier=RSComponents, ComponentLink4Description=https://datasheet.ciiva.com/2481/cra-2481796.pdf?src-supplier=Digi-Key, ComponentLink4URL=https://datasheet.ciiva.com/2481/cra-2481796.pdf?src-supplier=Digi-Key, ComponentLink5Description=https://datasheet.ciiva.com/2481/cra-2481797.pdf?src-supplier=Digi-Key, ComponentLink5URL=https://datasheet.ciiva.com/2481/cra-2481797.pdf?src-supplier=Digi-Key, ComponentLink6Description=https://datasheet.ciiva.com/16775/70154444-16775925.pdf?src-supplier=Allied+Electronics, ComponentLink6URL=https://datasheet.ciiva.com/16775/70154444-16775925.pdf?src-supplier=Allied+Electronics, ComponentLink7Description=https://datasheet.ciiva.com/2481/cra-2481798.pdf?src-supplier=Digi-Key, ComponentLink7URL=https://datasheet.ciiva.com/2481/cra-2481798.pdf?src-supplier=Digi-Key, ComponentLink8Description=https://datasheet.ciiva.com/16941/cra-16941096.pdf?src-supplier=Avnet+Europe, ComponentLink8URL=https://datasheet.ciiva.com/16941/cra-16941096.pdf?src-supplier=Avnet+Europe, ComponentLink9Description=https://datasheet.ciiva.com/1480/1849485-1480650.pdf?src-supplier=Element14, ComponentLink9URL=https://datasheet.ciiva.com/1480/1849485-1480650.pdf?src-supplier=Element14, ComponentLink10Description=https://datasheet.ciiva.com/30143/937cra-30143262.pdf?src-supplier=Onlinecomponents.com, ComponentLink10URL=https://datasheet.ciiva.com/30143/937cra-30143262.pdf?src-supplier=Onlinecomponents.com, Composition="Metal Film", Contact Plating=Tin, Depth=3.2mm, Features="Moisture Resistant", Height=0.6mm, Length=6.4mm, Manufacturer Part Number=CRA2512-FZ-R010ELF, Military Standard=Not, Mount="Surface Mount", Number of Pins=2, Number of Terminations=2, Packaging="Tape and Reel", Power Rating=3W, Pricing 1="8000 = 0.22000 (USD)", Radiation Hardening=No, REACH SVHC="No SVHC", RoHS=Yes, Stock 1=0, Supplier 1="Allied Electronics", Termination=SMD/SMT, Width=3.2mm
RS2: "RES SMD 15 MOHM 1% 3W 2512", Case/Package=2512, Case Code (Metric)=6432, Manufacturer=Bourns, Max Operating Temperature=170°C, Max Power Dissipation=3W, Min Operating Temperature=-55°C, Package Quantity=1, Resistance=15m, Supplier Part Number 1=CRA2512-FZ-R015ELFCT-ND, Temperature Coefficient=75ppm/°C, Tolerance=1%, Case Code (Imperial)=2512, ComponentLink1Description=https://datasheet.ciiva.com/11809/0900766b80ddce06-11809887.pdf?src-supplier=RSComponents, ComponentLink1URL=https://datasheet.ciiva.com/11809/0900766b80ddce06-11809887.pdf?src-supplier=RSComponents, ComponentLink2Description=https://datasheet.ciiva.com/6548/cra-6548395.pdf?src-supplier=Digi-Key, ComponentLink2URL=https://datasheet.ciiva.com/6548/cra-6548395.pdf?src-supplier=Digi-Key, ComponentLink3Description=https://datasheet.ciiva.com/6548/cra-6548411.pdf?src-supplier=Digi-Key, ComponentLink3URL=https://datasheet.ciiva.com/6548/cra-6548411.pdf?src-supplier=Digi-Key, ComponentLink4Description=https://datasheet.ciiva.com/6548/cra-6548413.pdf?src-supplier=Digi-Key, ComponentLink4URL=https://datasheet.ciiva.com/6548/cra-6548413.pdf?src-supplier=Digi-Key, ComponentLink5Description=https://datasheet.ciiva.com/48692/001055548-da-01-en-wid-cra2512-fz-r015elf-0-015-ohm-3w-1-48692039.pdf?src-supplier=Conrad, ComponentLink5URL=https://datasheet.ciiva.com/48692/001055548-da-01-en-wid-cra2512-fz-r015elf-0-015-ohm-3w-1-48692039.pdf?src-supplier=Conrad, Composition="Metal Film", Depth=3.2mm, Features="Moisture Resistant", Height=0.035inch, Lead Free="Lead Free", Length=0.254inch, Manufacturer Part Number=CRA2512-FZ-R015ELF, Military Standard=Not, Mount="Surface Mount", Number of Terminations=2, Packaging="Tape and Reel", Power Rating=3W, Pricing 1="1 = 0.69000, 10 = 0.57800, 25 = 0.49560, 50 = 0.44600, 100 = 0.38810, 250 = 0.34684, 500 = 0.28078, 1000 = 0.22710 (USD)", REACH SVHC="No SVHC", RoHS=Yes, Stock 1=23418, Supplier 1=Digi-Key, Termination=Solder, Width=0.126inch
U1_Motor1_Pitch U1_Motor2 U1_Motor3: "DRV8313 2.5-A Triple 1/2-H Bridge Driver", Supplier Part Number 1=296-35540-5-ND, Mfg="Texas Instruments", Mfg#=DRV8313PWP, Published=2017-11-16, Publisher="UVic AERO, Taylor Long", Supplier 1=Digi-Key, Verified=No
U2 U6: "LM3150 - DC DC Cntrlr Single-OUT Step Down 6V to 42V Input 14-Pin HTSSOP EP Tube", Case/Package="HTSSOP EP", Manufacturer="TI National Semiconductor", Max Frequency=1MHz, Max Input Voltage=42V, Max Operating Temperature=125°C, Min Input Voltage=6V, Min Operating Temperature=-40°C, Min Output Voltage=600mV, Output Current=12A, Quiescent Current=3.5mA, Supplier Part Number 1=LM3150MH/NOPB-ND, ComponentLink1Description=https://datasheet.ciiva.com/15113/getdatasheetpartid-147301-15113226.pdf?src-supplier=Verical, ComponentLink1URL=https://datasheet.ciiva.com/15113/getdatasheetpartid-147301-15113226.pdf?src-supplier=Verical, Contact Plating=Tin, Duty Cycle=95%, Features=UVLO, Height=0.9mm, Lead Free="Lead Free", Length=5mm, Manufacturer Part Number=LM3150MH/NOPB, Max Supply Voltage=42V, Min Supply Voltage=6V, Mount="Surface Mount", Number of Outputs=1, Number of Pins=14, Output Voltage=600mV, Packaging=Rail/Tube, Pricing 1="1 = 3.78000, 10 = 3.39400, 94 = 3.20851, 188 = 2.78069, 564 = 2.36716, 1034 = 1.99640, 2538 = 1.89658, 5076 = 1.82528 (USD)", Radiation Hardening=No, REACH SVHC="No SVHC", RoHS=Yes, Stock 1=2498, Supplier 1=Digi-Key, Switching Frequency=1MHz, Width=4.4mm
U3 U7: library part INA139NA/3K, "No Description Available", Case/Package=SOT-23, Input Bias Current=10uA, Input Offset Voltage (Vos)=1mV, Manufacturer="Texas Instruments", Max Operating Temperature=125°C, Max Supply Voltage=40V, Min Operating Temperature=-40°C, Min Supply Voltage=2.7V, Nominal Supply Current=125uA, Package Quantity=3000, Supplier Part Number 1=296-26061-1-ND, Accuracy=0.5%, Bandwidth=440kHz, Built_By=EMA_UL_Team, Common Mode Rejection Ratio=100dB, ComponentLink1Description=https://datasheet.ciiva.com/15128/getdatasheetpartid-248784-15128606.pdf?src-supplier=Verical, ComponentLink1URL=https://datasheet.ciiva.com/15128/getdatasheetpartid-248784-15128606.pdf?src-supplier=Verical, ComponentLink2Description=https://datasheet.ciiva.com/26875/ina139na-3k-26875768.pdf?src-supplier=IIIC, ComponentLink2URL=https://datasheet.ciiva.com/26875/ina139na-3k-26875768.pdf?src-supplier=IIIC, ComponentLink3Description=https://datasheet.ciiva.com/2976/ina169-2976115.pdf?src-supplier=Avnet, ComponentLink3URL=https://datasheet.ciiva.com/2976/ina169-2976115.pdf?src-supplier=Avnet, ComponentLink4Description=https://datasheet.ciiva.com/1939/ina139-1939992.pdf?src-supplier=Digi-Key, ComponentLink4URL=https://datasheet.ciiva.com/1939/ina139-1939992.pdf?src-supplier=Digi-Key, ComponentLink5Description=https://datasheet.ciiva.com/1939/ina139-1939993.pdf?src-supplier=Digi-Key, ComponentLink5URL=https://datasheet.ciiva.com/1939/ina139-1939993.pdf?src-supplier=Digi-Key, ComponentLink6Description=https://datasheet.ciiva.com/1939/ina139-1939994.pdf?src-supplier=Digi-Key, ComponentLink6URL=https://datasheet.ciiva.com/1939/ina139-1939994.pdf?src-supplier=Digi-Key, Copyright="Copyright (C) 2018 Accelerated Designs. All rights reserved", Lead Free="Lead Free", Manufacturer_Part_Number=INA139NA/3K, Manufacturer Part Number=INA139NA/3K, Mount="Surface Mount", Number of Channels=1, Number of Elements=1, Number of Pins=5, Packaging="Tape and Reel", Pricing 1="1 = 1.74000, 10 = 1.56100, 100 = 1.25490, 500 = 1.03104, 1000 = 0.85428 (USD)", Radiation Hardening=No, RefDes=RefDes, RoHS=Yes, Stock 1=23950, Supplier 1=Digi-Key, Type=DEV, Vendor="Texas Instruments", Weight=0.000617oz
U4 U8: library part CMP-0272-00929-3, "Single-Supply, Rail-to-Rail Operational Amplifier MicroAmplifier(TM) Series, 2.7 to 5.5 V, -40 to 85 degC, 5-pin SOT23 (DBV5), Green (RoHS & no Sb/Br)", Manufacturer="Texas Instruments", Total Supply Voltage(Max)(+5V is 5, +/-5V is 10)=5.5, Total Supply Voltage(Min)(+5V is 5, +/-5V is 10)=2.7, CMRR(Min)(dB)=80, Code_JEDEC=MO-178, ComponentLink1Description="Manufacturer URL", ComponentLink1URL=http://www.ti.com/, ComponentLink2Description=Datasheet, ComponentLink2URL=http://www.ti.com/general/docs/lit/getliterature.tsp?genericPartNumber=OPA340&fileType=pdf, ComponentLink3Description="Package Specification", ComponentLink3URL=http://www.ti.com/litv/pdf/mpds018i, DatasheetVersion=SBOS073B, Eco-Plan="Green (RoHS & no Sb/Br)", IIB(Max)(pA)=10, Iq per channel(Max)(mA)=0.95, Mounting Technology="Surface Mount", Number of Channels=1, Offset Drift(Typ)(uV/C)=2.5, PackageDescription="5-Pin Plastic Small Outline, Body 1.6 x 2.9 mm, Pitch 0.95 mm", PackageReference=DBV0005A, PackageVersion="4073253-4/K, 03/2006", PartNumber=OPA340NA/3K, Slew Rate(Typ)(V/us)=6, Sub Family="Low Input Bias Current Amp (<=10pA), Low Offset Voltage Amplifier (<=500uV), Low Supply Voltage Amplifier (<=2.7V), Precision Amplifier", Vio (25C)(Max)(mV)=0.5, Vn at 1kHz(Typ)(nV/rtHz)=25
U5: "500 mA Low Quiescent Current Low Noise Voltage Regulator, 3.3V, 6-Pin VDFDPN, Tape and Reel CMP-0244-00288-", ComponentLink1Description="Manufacturer URL", ComponentLink1URL=http://www.st.com, ComponentLink2Description=Datasheet, ComponentLink2URL=http://www.st.com/internet/com/TECHNICAL_RESOURCES/TECHNICAL_LITERATURE/DATASHEET/CD00227527.pdf, DatasheetVersion=1/03/2009, PackageDescription="6-Pin Plastic, Dual LLP, 3 x 3 mm Body, 0.95 mm Pitch, Exposed Pad", PackageReference=DFN6D, PackageVersion=2008
U9_RC_MODE U9_RC_PITCH U9_RC_YAW: "IC BUF NON-INVERT 5.5V SOT23-5", Case/Package=SOT-23-5, High Level Output Current=-8mA, Low Level Output Current=8mA, Manufacturer="Texas Instruments", Max Operating Temperature=125°C, Max Supply Voltage=5.5V, Min Operating Temperature=-40°C, Min Supply Voltage=1.6V, Package Quantity=3000, Quiescent Current=1uA, Supplier Part Number 1=296-37176-1-ND, ComponentLink1Description=https://datasheet.ciiva.com/29634/sn74lv1t34-29634758.pdf?src-supplier=Digi-Key, ComponentLink1URL=https://datasheet.ciiva.com/29634/sn74lv1t34-29634758.pdf?src-supplier=Digi-Key, ComponentLink2Description=https://datasheet.ciiva.com/29634/sn74lv1t34-29634759.pdf?src-supplier=Digi-Key, ComponentLink2URL=https://datasheet.ciiva.com/29634/sn74lv1t34-29634759.pdf?src-supplier=Digi-Key, ComponentLink3Description=https://datasheet.ciiva.com/29634/sn74lv1t34-29634760.pdf?src-supplier=Digi-Key, ComponentLink3URL=https://datasheet.ciiva.com/29634/sn74lv1t34-29634760.pdf?src-supplier=Digi-Key, ComponentLink4Description=https://datasheet.ciiva.com/29888/sn74lv1t34-29888041.pdf?src-supplier=Avnet, ComponentLink4URL=https://datasheet.ciiva.com/29888/sn74lv1t34-29888041.pdf?src-supplier=Avnet, Lead Free="Lead Free", Logic Function=Buffer, Manufacturer Part Number=SN74LV1T34DBVR, Mount="Surface Mount", Number of Bits=1, Number of Bits per Element=1, Number of Channels=1, Number of Elements=1, Number of Input Lines=1, Number of Inputs=1, Number of Output Lines=1, Number of Outputs=1, Number of Pins=5, Operating Supply Current=8mA, Packaging="Tape and Reel", Polarity=Non-Inverting, Pricing 1="1 = 0.47000, 10 = 0.37800, 100 = 0.25710, 500 = 0.19282, 1000 = 0.14461 (USD)", Propagation Delay=15.5ns, Radiation Hardening=No, REACH SVHC="No SVHC", RoHS=Yes, Stock 1=20051, Supplier 1=Digi-Key, Weight=0.000353oz
U10: library part CMP-0537-00048-1, "ARM Cortex-M4 32-bit MCU, 512 KB Flash, 80 KB Internal RAM, 51 I/Os, 64-Pin LQFP, -40 to 85 degC, Tray", I/Os (High Current)=51, Operating Frequency(F) (Processor speed) (MHz)=72, Package Description="64-Pin Low-profile Quad Flat Package, Body 10 x 10 mm, Pitch 0.5 mm", Package Reference=LQFP64, Supply Voltage(Vcc) min (V)=2, ComponentLink1Description="Manufacturer URL", ComponentLink1URL=http://www.st.com/, ComponentLink2Description=Datasheet, ComponentLink2URL=http://www.st.com/st-web-ui/static/active/en/resource/technical/document/datasheet/DM00118585.pdf, Core="ARM Cortex-M4", D/A Converter=2, DatasheetVersion="Rev. 5", FLASH Size (Prog) (kB)=512, Internal RAM Size (kB)=80, Mounting Technology="Surface Mount", Packing=Tray
Y1: library part "Crystal 8MHz, 18pF, 4-SMD 6.0x3.6mm", "Crystal Oscillator 8MHz, 18pF, 4-SMD", Supplier Part Number 1=535-9628-1-ND, Published="March 24, 2011", Publisher="UVic AERO, Taylor Long", Supplier 1=Digi-Key
Y2: library part "Crystal 32.768khz, 4-SOJ 5.5mm", "Crystal Oscillator 32.768kHz, 4-SOJ 5.5mm", Loaded Capacitance=6pF, Supplier Part Number 1=XC1307CT-ND, Published=2017-11-22, Publisher="UVic AERO. Taylor Long", Supplier 1=Digi-Key, Verified=no

## Via types
v1: diameter 23.62, hole 11.81, Top Layer to Bottom Layer, tented both sides, 540 vias
v2: diameter 23.62, hole 11.81, Top Layer to Bottom Layer, 55 vias

## Nets (pads, with @x,y where several pads share a name; then routed paths per layer and width w, separated by ;. In a path a pad name is that pad's centre, name@x,y a point inside that pad or via, vN(x,y) a via of type N, cw(c..) or ccw(c..) an arc to the next point about the centre after c; other vN are vias at no path point)
3.3VDC: C20.2 C21.2 C31.2 C35_RC_MODE.2 C35_RC_PITCH.2 C35_RC_YAW.2 C38.2 C39.2 C40.2 C41.2 L3.1 P5.1 P6.1 P8.1 P10.1 P12.1 P14.1 R1.2 R2.2 R3.2 R4.2 U4.5 U5.4 U8.5 U9_RC_MODE.5 U9_RC_PITCH.5 U9_RC_YAW.5 U10.1 U10.19 U10.32 U10.48 U10.64 | length 2503
  Top Layer w10: P5.1@335.63,837.6 P5.1@336.34,836.89 ; R1.2@479.06,836.89 R1.2@491.14,824.8
  Top Layer w15: v1(217.52,837.6) P5.1@335.63,837.6 ; v1(220.47,358.27) P8.1@338.58,358.27 ; P5.1@336.34,836.89 R1.2@479.06,836.89 ; v1(548.66,1026.46) R2.2@629.92,1026.46 ; v1(730.31,208.66) P14.1@730.31,326.77 ; v1(1159.45,210.63) P12.1@1159.45,328.74 P12.1@1161.42,326.77 ; v1(1596.46,210.63) P10.1@1596.46,328.74
  Bottom Layer w10: v1(867.62,825.3) 872.05,820.87 U10.19@951.77,820.87
  Bottom Layer w18: C41.2@818.9,838.58 854.33,838.58 v1(867.62,825.3) ; C40.2@853.35,1119.09 857.28,1115.16 942.91,1115.16 951.77,1106.3 951.77,1084.65 ; 1332.04,1153.54 1342.52,1153.54 1370.08,1153.54 v1(1391.73,1175.2) 1413.39,1196.85 C39.2@1413.39,1237.2
  Bottom Layer w35: v1(901.57,494.09) L3.1@901.57,543.31 ; P6.1@1545.08,1210 1615.31,1139.76 2071.85,1139.76 2503.94,1571.85 U4.5@2503.94,1618.11
  other v1: 1722.44,539.37 1752.95,539.37 1783.46,539.37 1722.44,569.88 1752.95,569.88 1783.46,569.88 1722.44,600.39 1752.95,600.39 1783.46,600.39 2664.37,671.26 2700.79,671.26 2590.55,672.24 2626.97,672.24 1550.2,675.2 1580.71,675.2 1356.3,676.18 1550.2,705.71 1580.71,705.71 2664.37,707.68 2700.79,707.68 2590.55,708.66 2626.97,708.66 1550.2,736.22 1580.71,736.22 2590.55,745.08 1444.88,757.35 1664.37,767.72 909.45,1116.14
5V_Buck_Feedback: C25.1 R11.1 R12.2 U6.4 | length 514.8
  Bottom Layer w18: C25.1@2355.31,763.78 2351.94,767.16 2351.94,820.31 2259.84,912.4 2259.84,1065.94 2290.35,1096.46 U6.4@2420.28,1096.46
5VDC: C18.2 C19.2 C23.1 C24.1 C25.2 J1.2 J2.2 J3.2 P3.1 R11.2 RS2.2 U5.1 U5.6 U7.4 U7.5
  other v1: 2166.34,426.18 2166.34,456.69 2166.34,487.2 2206.69,524.61 2237.2,524.61 2267.72,524.61 2298.23,524.61 2084.65,555.12 2115.16,555.12 2145.67,555.12 2176.18,555.12 2206.69,555.12 2054.13,585.63 2084.65,585.63 2115.16,585.63 2145.67,585.63 2176.18,585.63 2206.69,585.63 1866.14,601.38 1896.65,601.38 1927.17,601.38 1957.68,601.38 1988.19,601.38 2054.13,616.14 1988.19,631.89 2054.13,646.65 2018.7,657.48 2018.7,687.99 2018.7,718.5 1804.13,862.2 1804.13,892.72 1773.62,923.23 1804.13,923.23 1804.13,953.74
12V_Buck_Feedback: C14.1 R7.1 R8.2 U2.4 | length 536
  Bottom Layer w18: R8.2@3016.73,1799.21 R7.1@3016.73,1716.54 3017.22,1716.04 3017.22,1630.41 C14.1@3017.72,1629.92 3017.72,1625.98 3061.02,1582.68 3061.02,1482.28 3084.65,1458.66 U2.4@3251.97,1458.66
12VDC: C1_Motor1_Pitch.2 C1_Motor2.2 C1_Motor3.2 C1_Motor4.2 C1_Motor5.2 C2_Motor1_Pitch.1 C2_Motor2.1 C2_Motor3.1 C4_Motor1_Pitch.2 C4_Motor2.2 C4_Motor3.2 C5_Motor1_Pitch.2 C5_Motor2.2 C5_Motor3.2 C11.1 C12.1 C13.1 C14.2 R7.2 RS1.2 U1_Motor1_Pitch.4 U1_Motor1_Pitch.11 U1_Motor2.4 U1_Motor2.11 U1_Motor3.4 U1_Motor3.11 U3.4 U3.5
  other v1: 2888.78,1385.83 3006.89,1385.83 2654.81,1395.67 2684.34,1395.67 2713.86,1395.67 2746.77,1395.67 2776.29,1395.67 2805.82,1395.67 2835.35,1395.67 2888.78,1415.35 3006.89,1415.36 2888.78,1444.88 3006.89,1444.88 2888.78,1474.41 3006.89,1474.41 2711.61,1503.94 2741.14,1503.94 2770.67,1503.94 2800.2,1503.94 2829.72,1503.94 2859.25,1503.94 2888.78,1503.94 2918.31,1503.94 2947.83,1503.94 2977.36,1503.94 3006.89,1503.94 2711.61,1598.43 2741.14,1598.43 2770.67,1598.43 2800.2,1598.43 2829.72,1598.43 2859.25,1598.43 2888.78,1598.43 2472.72,1641.73 696.14,1643.7 1585.63,1643.7 797.24,1647.64 833.66,1647.64 906.5,1647.64 942.91,1647.64 1687.01,1647.64 1723.43,1647.64 1796.26,1647.64 1832.68,1647.64 2472.72,1671.26 696.14,1673.23 1585.63,1673.23 797.24,1680.54 942.91,1680.54 1687.01,1680.54 1832.68,1680.54 281.99,1708.66 311.02,1708.66 1171.75,1708.66 1200.79,1708.66 2058.76,1708.66 2087.8,1708.66 797.24,1713.44 942.91,1713.44 1687.01,1713.44 1832.68,1713.44 281.99,1737.7 311.02,1737.7 1171.75,1737.7 1200.79,1737.7 2058.76,1737.7 2087.8,1737.7 797.24,1746.34 942.91,1746.34 1687.01,1746.34 1832.68,1746.34 797.24,1779.25 942.91,1779.25 1687.01,1779.25 1832.68,1779.25 2359.25,1805.12 2388.78,1805.12 582.28,1806.1 615.19,1806.1 1472.44,1806.1 1501.97,1806.1 2535.43,1807.04 2653.54,1807.04 797.24,1812.15 942.91,1812.15 1687.01,1812.15 1832.68,1812.15 2359.25,1834.65 2388.78,1834.65 1472.44,1835.63 1501.97,1835.63 2535.43,1836.56 2653.54,1836.56 516.48,1839 549.38,1839 582.28,1839 615.19,1839 797.24,1845.05 942.91,1845.05 1687.01,1845.05 1832.68,1845.05 648.09,1852.36 680.99,1852.36 713.89,1852.36 746.79,1852.36 2300.2,1865.16 2330.22,1865.11 2359.25,1865.11 2388.78,1865.11 1413.39,1866.14 1443.41,1866.09 1472.44,1866.09 1501.97,1866.09 1531.5,1866.09 2535.43,1866.09 2653.54,1866.09 549.38,1871.91 582.28,1871.91 797.24,1877.95 833.66,1877.95 906.5,1877.95 942.91,1877.95 1687.01,1877.95 1723.43,1877.95 1796.26,1877.95 1832.68,1877.95 648.09,1885.26 746.79,1885.26 2358.27,1893.7 2300.2,1894.68 2330.22,1894.63 2388.78,1894.63 1413.39,1895.67 1443.41,1895.62 1531.5,1895.62 2535.43,1895.62 2653.54,1895.62 2535.43,1925.15 2653.54,1925.15 2535.43,1954.67 2564.96,1954.67 2594.49,1954.67 2624.02,1954.67 2653.54,1954.67
CURR_MON_5V: U8.1 U8.4 U10.11 | length 1167.5
  Top Layer w10: v1(1103.35,756.89) 1124.27,735.97 1338.33,735.97 1619.09,1016.73 v1(1675.2,1016.73)
  Bottom Layer w10: v1(1103.35,756.89) 1105.31,756.89 1126.62,735.58 1126.62,704.87 U10.11@1126.87,704.63 ; v1(1675.2,1016.73) 1675.2,974.46 1765.75,883.91 1765.75,855.32 1781.26,839.8 1781.26,803.39 U8.1@1783.46,801.18
  Bottom Layer w18: U8.1@1783.46,801.18 1785.43,799.21 1785.43,768.7 1858.27,695.87 U8.4@1858.27,685.04
CURR_MON_12V: U4.1 U4.4 U10.15 | length 2552.2
  Top Layer w15: v1(977.36,1157.48) 977.36,1140.75 v1(1075.79,1042.32)
  Bottom Layer w15: v1(977.36,1157.48) 977.36,1217.52 1144.69,1384.84 2266.73,1384.84 2436.02,1554.13 2436.02,1700.79 2475.39,1740.16 2498.03,1740.16 U4.1@2503.94,1734.25 2503.94,1689.96 2531.5,1662.4 2531.5,1650.59 2562.99,1619.09 2577.76,1619.09 U4.4@2578.74,1618.11 ; U10.15@1048.23,704.72 1048.23,1014.76 v1(1075.79,1042.32)